# Altium PCB Pult S1 pcb.PcbDoc
Units mm, origin at the board's own origin, x right, y up, seen from the top; angles counter-clockwise.
Board outline 20.97 x 21.01 mm, 2 copper layers (Top Layer, Bottom Layer); 37 components, 31 nets, 108 pads, 30 vias.
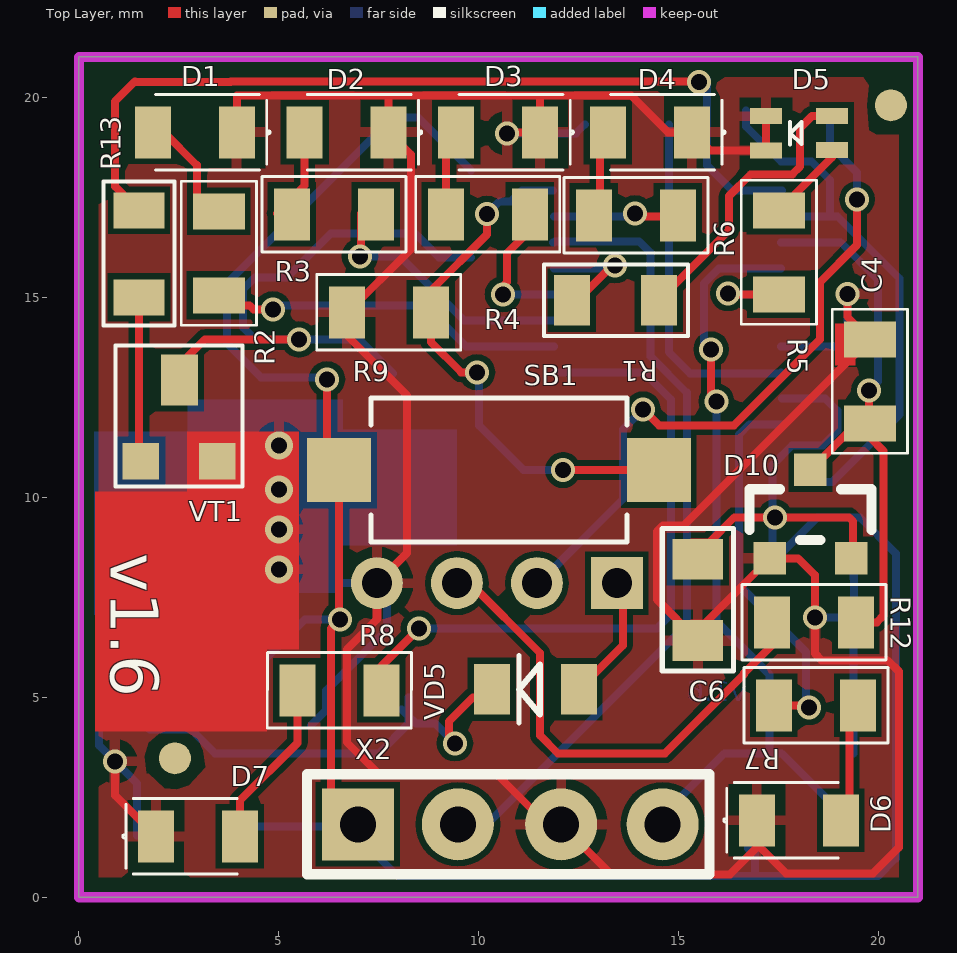
[diagram p0: Top Layer view]
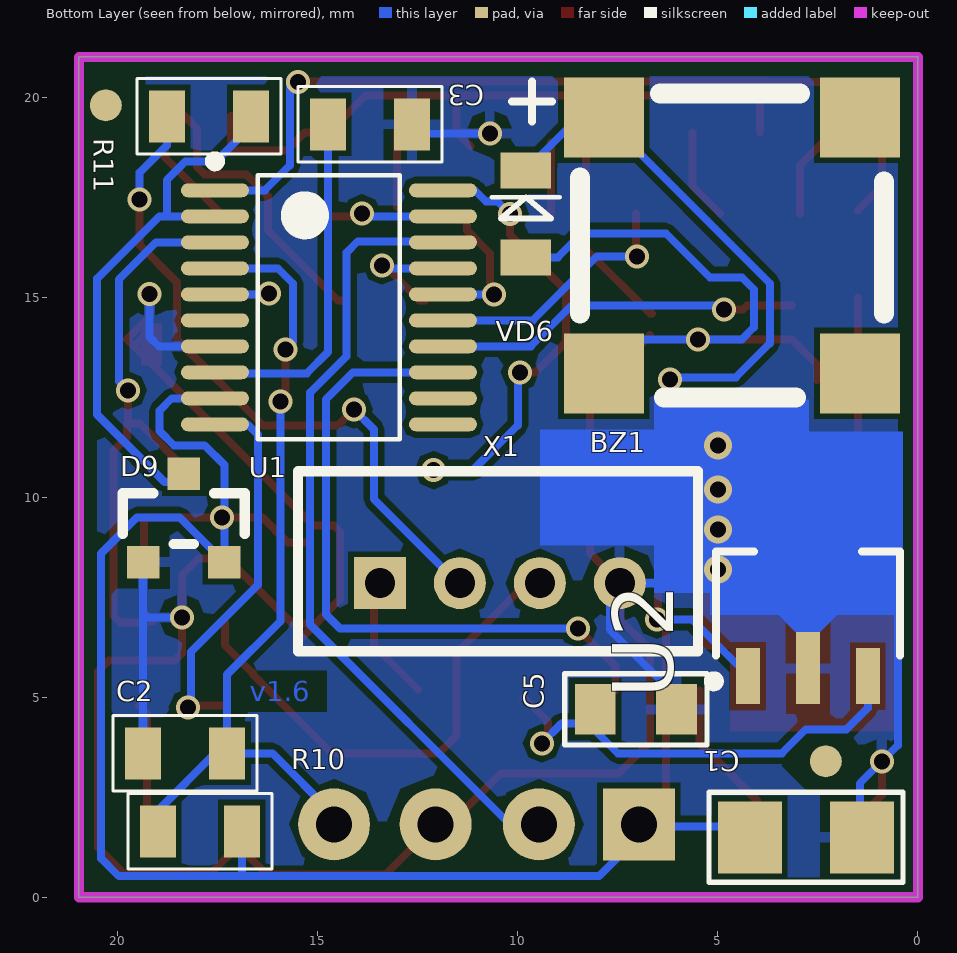
[diagram p1: Bottom Layer view, seen from below]
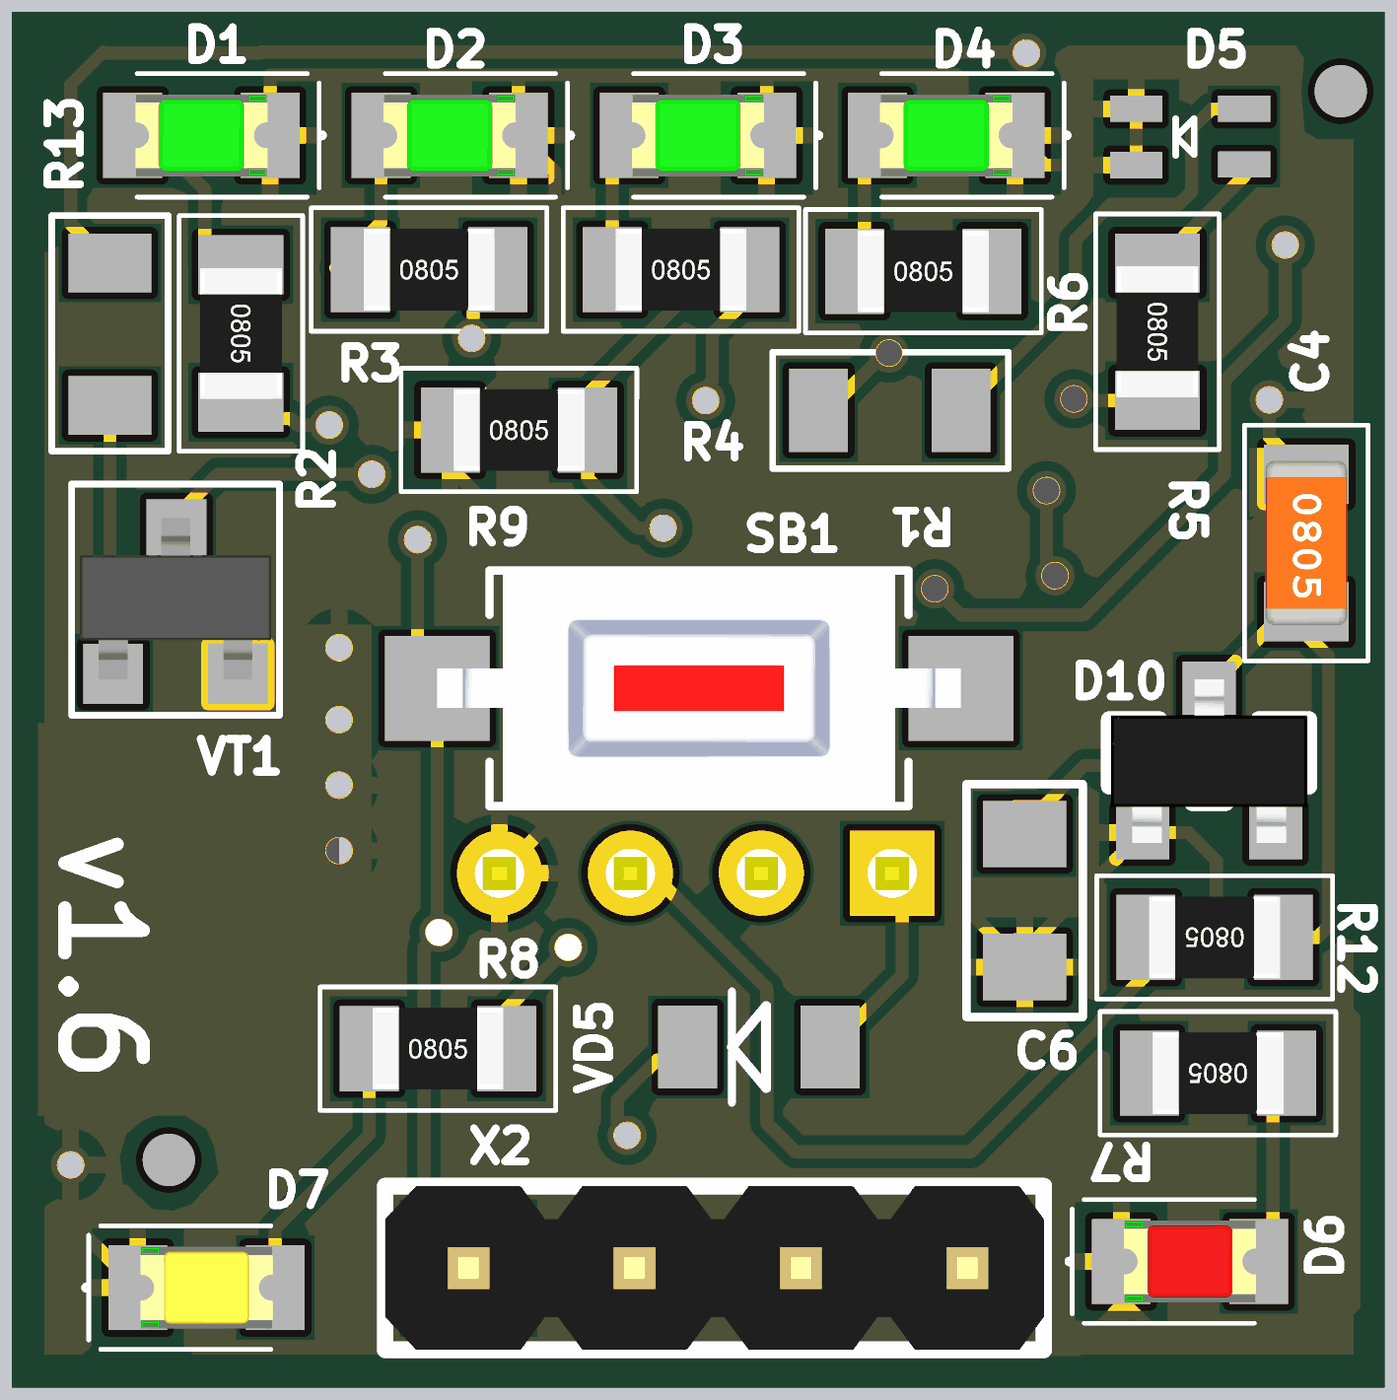
[diagram p2: 3D render of the assembled board from above, using the file's embedded part models]
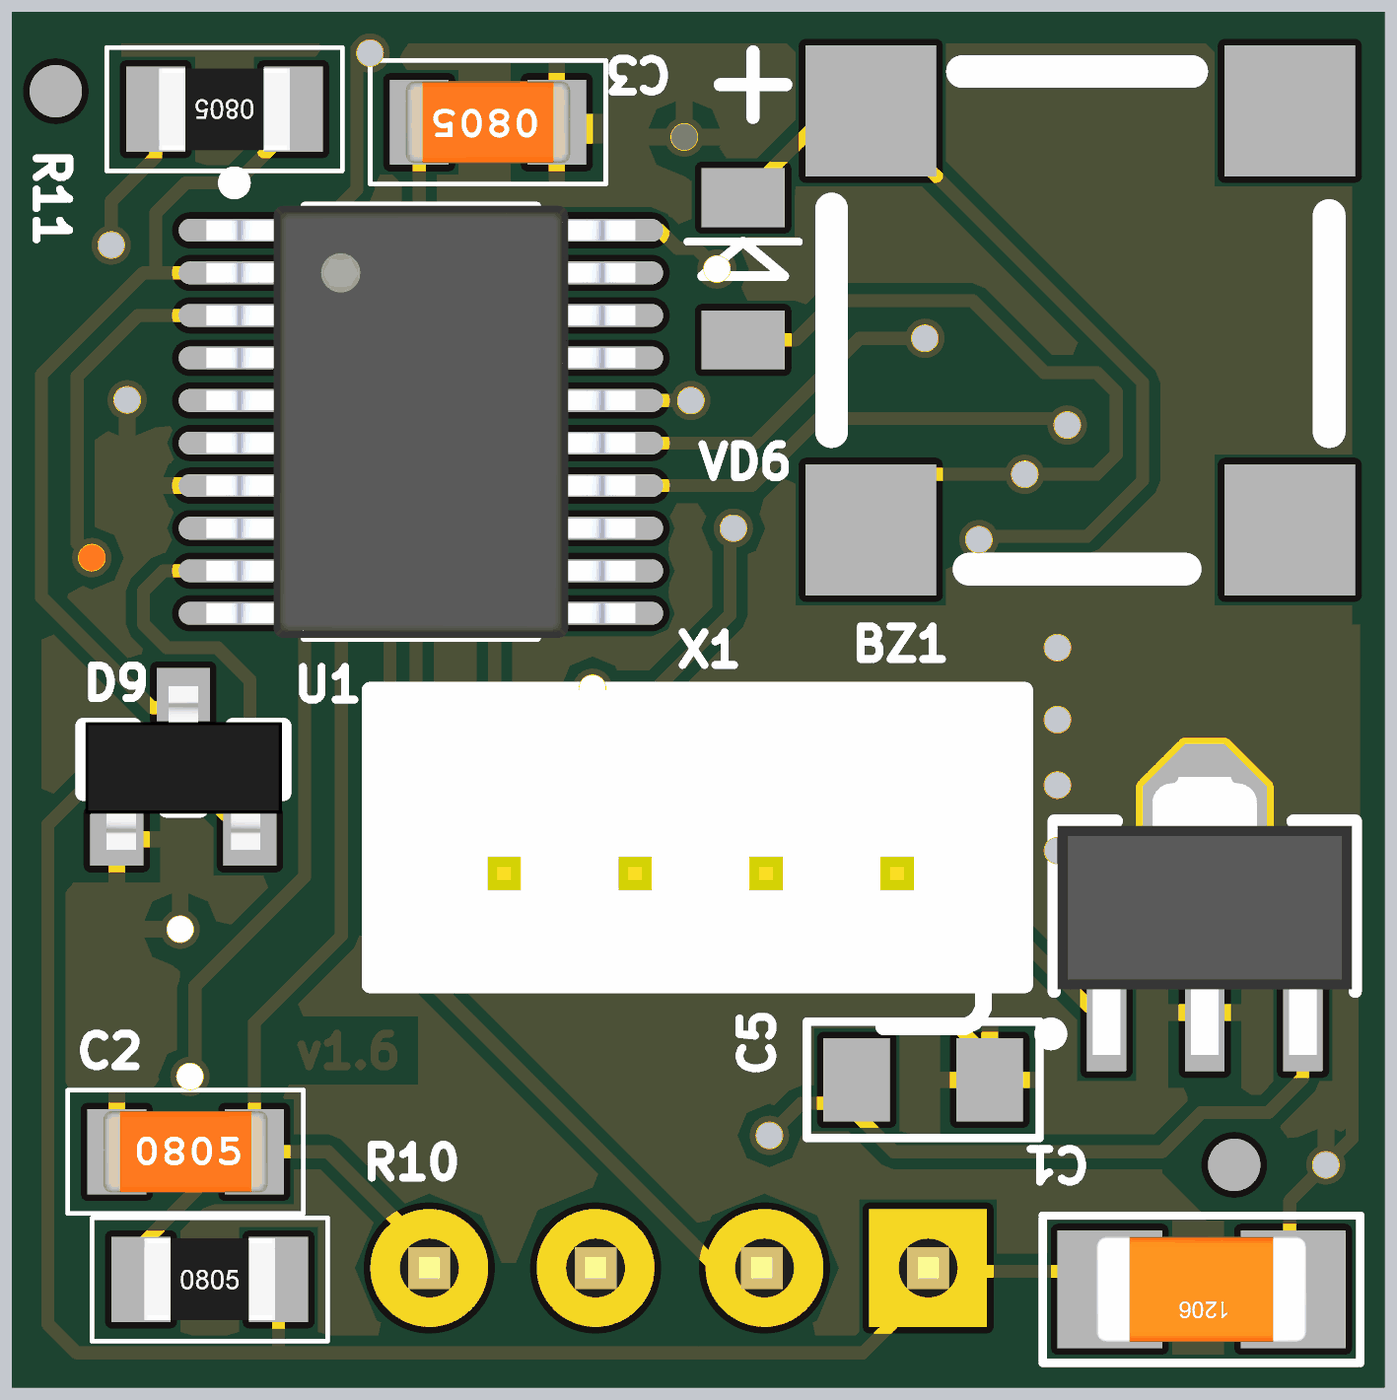
[diagram p3: 3D render of the assembled board from below, using the file's embedded part models]

## Layer stack, top to bottom
Top Solder: solder mask 0.0102, Solder Resist, Dk 3.5
Top Layer: signal copper 0.0356
Dielectric1: dielectric 0.32, FR-4, Dk 4.8
Bottom Layer: signal copper 0.0356
Bottom Solder: solder mask 0.0102, Solder Resist, Dk 3.5

## Board outline
0,0 20.973,0 20.973,21.009 0,21.009

## Design rules (kind name [scope] priority, off if disabled: settings)
Clearance [All] p1: gap=0.15
MinimumSolderMaskSliver [All] p1: minsoldermaskwidth=0.05
PolygonConnect [All] p1: connectstyle=Relief reliefconductorwidth=0.254 reliefentries=4 polygonreliefangle="90 Angle" airgapwidth=0.254
RoutingVias [All] p1: holewidth=0.4 width=0.6 viastyle="Through Hole" minholewidth=0.4 minwidth=0.6 maxholewidth=0.4 maxwidth=0.7
SMDNeckDown [All] p1: percent=100.000
SilkToSilkClearance [All] p1: silktosilkclearance=0.01
SilkToSolderMaskClearance [IsPad] p1: minsilkscreentomaskgap=0.1 clearancetoexposedcopper=TRUE
SolderMaskExpansion [All] p1: expansion=0.102
UnpouredPolygon [All] p1: allowunpoured=FALSE
Width [All] p1: maxlimit=0.4 minlimit=0.18 preferedwidth=0.18
26 further rules are at their usual default settings.

## Components (designator, comment, footprint, x,y, rotation, side; value= is the part's Value field where it differs from the comment)
BZ1 "HS7525M48" BUZER7.6x7.6 4.65,16.3 r180 bottom
C1 "25V 10uF" C_SMD_1206 2.8,1.5 r0 bottom
C2 "100n" C_SMD_0805_S 18.318,3.6 r180 bottom
C3 "470n" C_SMD_0805_S 13.698,19.325 r0 bottom
C4 "470p" C_SMD_0805_S 19.774,12.9 r270 top
C5 "100n" "0805 st" 7.05,4.7 r0 bottom
C6 "100n" "0805 st" 15.473,7.437 r90 top
D1 "GR" LED-0805_S_-GREEN 2.898,19.125 r0 top
D2 "GR" LED-0805_S_-GREEN 6.69,19.125 r0 top
D3 "GR" LED-0805_S_-GREEN 10.482,19.125 r0 top
D4 "GR" LED-0805_S_-GREEN 14.273,19.125 r0 top
D5 "KPTB-1612SURKCGKC" "LED 1.6x1.25 RG" 18,19.1 r0 top
D6 "RED" LED-0805_S_-RED 17.998,1.925 r180 top
D7 "YE" LED-0805_S_-YELLOW 2.975,1.525 r180 top
D9 "BAT54S" "SOT-23 - BAT54S" 19.368,8.374 r180 bottom
D10 "BAT54S" "SOT-23 - BAT54S" 17.273,8.475 r0 top
R1 "1k" "0805 W" 14.5,14.925 r180 top
R2 "1k" R_SMD_0805_S 3.5,16.1 r270 top
R3 "1k" R_SMD_0805_S 6.375,17.075 r0 top
R4 "1k" R_SMD_0805_S 10.223,17.075 r0 top
R5 "1k" R_SMD_0805_S 17.5,16.125 r270 top
R6 "1k" R_SMD_0805_S 13.925,17.05 r0 top
R7 "1k" R_SMD_0805_S 18.425,4.8 r180 top
R8 "1k" R_SMD_0805_S 6.511,5.175 r0 top
R9 "10k" R_SMD_0805_S 7.748,14.625 r0 top
R10 "10k" R_SMD_0805_S 17.948,1.65 r180 bottom
R11 "130R" R_SMD_0805_S 17.723,19.525 r0 bottom
R12 "510R" R_SMD_0805_S 18.375,6.875 r180 top
R13 "1K" "0805 W" 1.5,17.175 r270 top
SB1 "M1" MYGTUKAS_SMD_TACTILE_6x3.5 14.498,10.68 r180 top
U1 "STM8S003F3P6" TSSOP20_N 14.723,14.75 r180 bottom
U2 "78L05ACU" SOT89 2.75,7.328 r90 bottom
VD5 "CD4148" "0805 Diode" 12.5,5.2 r180 top
VD6 "CD4148" "0805 Diode" 9.8,16 r90 bottom
VT1 "BC817" SOT23-BCE 1.55,10.9 r90 top
X1 "B4B-PH-K-S" "JUNG_4k_1x4 kistukas" 13.45,7.855 r180 bottom
X2 "SWIM progr. jungtis" JUNG_4k_1x4_karpoma_kistukas 6.975,1.825 r0 top

## Footprints (in the part's own frame and the unit in brackets; to place one, negate y for a bottom-side part, rotate by r counter-clockwise, add the part's x,y. Pads: shape width x height; smd on the part's side, far side on the other; paste and mask are expansions set on the pad)
"0805 Diode" [mm]
  rect 0.9x1.27 smd: A(0,0) K(2.175,0)
  silkscreen extent 0.97,-0.85 1.5,0.85, body extent 0.09,-0.63 2.09,0.63, height 0.6
"0805 st" [mil]
  rect 40x50 smd: 1(-40,0) 2(40,0)
  silkscreen extent -70,-35 70,35, body extent -39,-25 39,25, height 20
"0805 W" [mm]
  rect 0.9x1.27 smd: 1(0,0) 2(2.175,0)
  silkscreen extent -0.72,-0.89 2.88,0.89, body extent 0.09,-0.62 2.09,0.62, height 0.9
BUZER7.6x7.6 [mm]
  rect 2x2 smd: +(-3.2,3.2) -(-3.2,-3.2) nc(3.2,-3.2) nc(3.2,3.2)
  silkscreen extent -5.5,-3.8 3.8,4.1, body extent -3.8,-3.8 3.8,3.8, height 2.5
C_SMD_0805_S [mm]
  rect 0.9x1.3 smd: 1(-1.05,0) 2(1.05,0)
  silkscreen extent -1.8,-0.94 1.8,0.94, body extent -1.25,-0.62 1.25,0.62, height 0.79
C_SMD_1206 [mm] "3.2 × 1.6 mm"
  rect 1.6x1.8 smd: 1(-1.4,0) 2(1.4,0)
  silkscreen extent -2.42,-1.12 2.42,1.12, body extent -1.6,-0.8 1.6,0.8, height 1
"JUNG_4k_1x4 kistukas" [mm] "JST Jungtis 2mm_kistukas"
  rect 1.3x1.3 hole 0.75: 1(0,0)
  round 1.3 hole 0.75: 2(2,0) 3(4,0) 4(6,0)
  silkscreen extent -2.05,-1.7 7.95,2.8, body extent -2.05,-1.7 7.95,2.8, height 6
JUNG_4k_1x4_karpoma_kistukas [mm] "Karpoma jungtis 2.54 mm_kistukas"
  rect 1.8x1.8 hole 0.9: 1(0,0)
  round 1.8 hole 0.9: 2(2.5,0) 3(5.08,0) 4(7.62,0)
  silkscreen extent -1.27,-1.25 8.79,1.25, body extent -1.27,-1.25 8.79,1.25, height 8.62
"LED 1.6x1.25 RG" [mm]
  rect 0.8x0.4 smd: 1(0.825,0.43) 2(-0.825,0.43) 3(0.825,-0.42) 4(-0.825,-0.43)
  silkscreen extent -0.22,-0.28 0.06,0.28, body extent -0.8,-0.62 0.8,0.62, height 0.7
LED-0805_S_-GREEN [mm]
  rect 0.9x1.3 smd: A(-1.05,0) K(1.05,0)
  silkscreen extent -0.98,-0.94 1.88,0.94, body extent -1.01,-0.62 1.01,0.63, height 1.1
LED-0805_S_-RED [mm]
  rect 0.9x1.3 smd: A(-1.05,0) K(1.05,0)
  silkscreen extent -0.98,-0.94 1.88,0.94, body extent -1.01,-0.62 1.01,0.63, height 1.1
LED-0805_S_-YELLOW [mm]
  rect 0.9x1.3 smd: A(-1.05,0) K(1.05,0)
  silkscreen extent -0.98,-0.94 1.88,0.94, body extent -1.01,-0.62 1.01,0.63, height 1.1
MYGTUKAS_SMD_TACTILE_6x3.5 [mm] "6 mm x 3.5 mm;"
  rect 1.6x1.6 smd: 1(0,0) 2(8,0)
  silkscreen extent 0.8,-1.8 7.2,1.8, body extent 0,-1.8 8,1.8, height 2.5
R_SMD_0805_S [mm]
  rect 0.9x1.3 smd: 1(-1.05,0) 2(1.05,0)
  silkscreen extent -1.8,-0.94 1.8,0.94, body extent -1,-0.62 1,0.63, height 0.6
SOT23-BCE [mil]
  rect 36x36 smd: B(0,0) E(0,-75)
  rect 50x36 smd: C(80,-38)
  silkscreen extent -25,-100 114,25, body extent -3,-95 94,20, height 41
SOT89 [mm] "SOT89, 3-Leads, Body 4,50x2,45mm, Pitch 1,50mm, Lead Span 4,1mm, IPC Medium Density"
  rect 1.4x0.6 smd: 1(-1.8,1.5) 3(-1.8,-1.5)
  rect 1.8x0.6 smd: 2(-1.6,0)
  Top Layer region: -0.7,0.3 -0.05,0.95 1.85,0.95 2.5,0.3 2.5,-0.3 1.85,-0.95 -0.05,-0.95 -0.7,-0.3
  silkscreen extent -2.05,-2.3 1.32,2.48, body extent -2.25,-2.25 2,2.25, height 1.54
"SOT-23 - BAT54S" [mil]
  rect 32x32 smd: 1(0,0) 2(80,0) 3(40,87)
  silkscreen extent -20,18 100,68, body extent -19,-6 99,92, height 41
TSSOP20_N [mm] "TSOP, 20-Leads, Body 6.5x4.4mm, Pitch 0.65mm, IPC Medium Density"
  oval 1.7x0.35 smd: 1(-2.85,2.925) 2(-2.85,2.275) 3(-2.85,1.625) 4(-2.85,0.975) 5(-2.85,0.325) 6(-2.85,-0.325) 7(-2.85,-0.975) 8(-2.85,-1.625) 9(-2.85,-2.275) 10(-2.85,-2.925) 11(2.85,-2.925) 12(2.85,-2.275) 13(2.85,-1.625) 14(2.85,-0.975) 15(2.85,-0.325) 16(2.85,0.325) 17(2.85,0.975) 18(2.85,1.625) 19(2.85,2.275) 20(2.85,2.925)
  silkscreen extent -2.98,-3.3 1.77,3.77, body extent -3.27,-3.3 3.28,3.3, height 1.2

## Part data
BZ1: library part "Buzzer AD-8505-FQ4-LF", "Buzzer, Magnetic SMD"
C1 C2 C3 C4 C5 C6: library part "Kondensatorius SMD"
D1 D2 D3 D4 D6 D7: library part "Sviesos diodas SMD 0805", "LED SMD 0805"
D5: library part LEDx2, "LED DIODE"
D9 D10: library part "Diodas BAT54S", "Dvygubas Sotki diodas"
R1 R2 R3 R4 R5 R6 R7 R8 R9 R10 R11 R12 R13: library part "Resistorius SMD", "Resistorius SMD"
SB1: library part "Mygtukas SMD", "Tactile Switch SMD"
U1: library part "Mikrovaldiklis STM8S003F3P6", "STM8, 16MHZ, TSSOP-20"
U2: library part "Itampos stabilizatorius 78L05ACD", "SMD +5V 100mA"
VD5 VD6: library part "DIODE SMD", "DIODE"
VT1: library part NPN-GENERIC, "NPN BIPOLAR TRANSISTOR"
X1: library part "Jungtis 4k JST B4B-PH-K-S", "4k; 2mm; B4B-PH-K-S"
X2: library part "Jungtis 4k karpoma 1x statmena Tevelis", "Tevelis 1-12 kontaktu"

## Free pads (board coordinates)
  round 0.8 smd far side: NC(2.3,3.4) NC(20.3,19.8)
  round 0.8 smd: NC(2.4,3.475) NC(20.3,19.8)

## Via types
v1: diameter 0.6, hole 0.4, Top Layer to Bottom Layer, tented both sides, 26 vias
v2: diameter 0.7, hole 0.4, Top Layer to Bottom Layer, tented both sides, 4 vias

## Nets (pads, with @x,y where several pads share a name; then routed paths per layer and width w, separated by ;. In a path a pad name is that pad's centre, name@x,y a point inside that pad or via, vN(x,y) a via of type N, cw(c..) or ccw(c..) an arc to the next point about the centre after c; other vN are vias at no path point)
5V: BZ1.+ C1.2 C6.2 D9.2 D10.2 R10.2 SB1.2 U1.9 U2.1 VD6.K X2.1 | length 69.7
  Top Layer w0.2: SB1.2@5.8,9.981 6.5,9.981 6.5,6.975 v1(6.525,6.95) 6.298,6.723 6.298,2.502 6.375,2.425 7.4,2.425 6.975,2 X2.1 ; v1(6.2,12.95) 6.2,10.978 SB1.2 ; C6.2@15.323,8.871 15.756,8.871 16.385,9.5 19.1,9.5 19.249,9.5 19.349,9.4 D10.2@19.349,8.519 ; D10.2 D10.2@19.349,8.519 ; D10.2@19.448,8.618 D10.2@19.349,8.519
  Bottom Layer w0.2: C1.2@4.225,1.775 6.925,1.775 X2.1 ; U2.1@4.514,5.814 5.65,6.95 v1(6.525,6.95) ; v1(6.2,12.95) 6.175,12.975 6.175,13 4.55,13 3.7,13.85 3.7,15.35 BZ1.+ 8.475,19.5 VD6.K ; X2.1@6.824,1.674 7.971,0.527 16.9,0.527 ; R10.2@16.723,1.223 R10.2@16.723,1.524 ; R10.2 16.898,0.529 16.9,0.527 ; U1.9 18.65,12.475 18.96,12.165 18.96,11.66 18.6,11.3 17.831,11.3 17.336,10.805 D9.2 18.462,9.5 19.1,9.5 19.521,9.5 20.423,8.598 20.423,0.975 19.975,0.527 16.9,0.527
  other v1: 17.4,9.5
12V: VD5.A X1.1 | length 3.2
  Top Layer w0.2: VD5.A 13.6,6.3 13.6,7.6 13.45,7.75 X1.1
GND: C1.1 C2.1 C3.1 C4.1 C5.1 C6.1 D1.K D2.K D3.K D4.K D5.2 D5.4 D6.K D7.K D9.1 D10.1 R9.1 U1.7 U2.2 VT1.E X1.4 X2.3 | length 107.9
  Top Layer w0.2: v1(0.9,3.4) 0.9,2.55 D7.K ; D1.K 3.948,20.05 7.74,20.05 ; R9.1@6.648,14.6 R9.1@6.698,14.6 ; R9.1@6.698,14.052 8.2,12.55 8.2,8.605 X1.4 7.45,6.95 6.698,6.198 6.698,3.877 7.475,3.1 10.423,3.1 X2.3@11.673,1.85 ; R9.1 R9.1@6.698,14.6 ; v1(10.7,19.1) 10.725,19.125 D3.K ; D3.K@11.178,18.771 D3.K ; 11.532,20 D3.K ; X2.3@11.612,1.85 X2.3@11.673,1.85 ; X2.3@12.03,1.85 X2.3@11.673,1.85 ; X2.3 13.305,0.575 16.275,0.575 16.948,1.248 D6.K@16.948,1.33 ; C6.1@15.323,6.839 15.637,6.839 D10.1 17.976,8.475 18.4,8.051 v1(18.4,7) 18.4,6.096 18.571,5.925 20.218,5.925 20.5,5.643 20.5,1.25 19.85,0.6 17.678,0.6 D6.K@16.948,1.33 ; C6.1 14.45,7.443 14.45,9.15 14.6,9.3 15.124,9.3 C4.1 19.21,14.514 v1(19.21,15.085) ; D6.K D6.K@16.948,1.33 ; D5.2 D5.4 15.778,18.67 D4.K 14.725,19.125 13.8,20.05 7.74,20.05 ; C4.1@19.369,14.004 C4.1@19.548,13.825 ; R9.1@6.698,14.6 8.3,16.202 8.3,18.565 D2.K 7.74,20.05
  Bottom Layer w0.2: 1.32,8.72 0.5,7.9 0.5,3.8 1.45,2.85 C1.1@1.45,1.55 ; 2.75,8.72 3.615,7.855 X1.4 ; C5.1@5.8,4.3 6.175,4.675 6.175,5.164 7.7,6.689 X1.4@7.7,7.605 ; X1.4@7.45,7.805 X1.4 ; X1.4@7.85,8.255 X1.4 ; v1(10.7,19.1) 12.423,19.1 C3.1 ; U1.7@17.548,13.775 U1.7 18.975,13.775 19.21,14.01 v1(19.21,15.085) ; v1(18.4,7) 19.273,7 19.373,7.1 ; C2.1 19.368,6.43 19.373,6.425 19.373,7.1 ; D9.1@19.368,7.968 D9.1 ; D9.1@19.398,8.175 19.373,8.175 19.373,7.1
  other v2: 5,8.2 5,9.2 5,10.2 5,11.3
NetBZ1_2: BZ1.- VD6.A VT1.C | length 15.3
  Top Layer w0.2: VT1.C 2.515,13.315 3.148,13.948 v1(5.5,13.948)
  Bottom Layer w0.2: BZ1.- 7.002,13.948 v1(5.5,13.948) 4.402,13.948 4.1,14.25 4.1,15.2 4.4,15.5 5.2,15.5 6.3,16.6 8.4,16.6 9,16 VD6.A
NetC2_2: C2.2 R10.1 U1.4 X2.4 | length 21.2
  Top Layer w0.2: X2.4@14.268,1.85 X2.4@14.573,1.85 ; v1(15.806,13.7) 15.806,12.531 v1(15.937,12.4)
  Bottom Layer w0.2: X2.4 14.595,2.058 16.137,3.6 C2.2 ; v1(15.806,13.7) 15.625,13.881 15.625,15.349 16.002,15.725 U1.4@17.548,15.725 ; v1(15.937,12.4) 15.937,6.899 17.268,5.568 C2.2 ; R10.1 18.998,2.17 17.568,3.6 C2.2
NetC3_2: C3.2 U1.8 | length 8.7
  Bottom Layer w0.2: C3.2 14.748,13.629 15.277,13.1 17.523,13.1 U1.8@17.548,13.125
NetC4_2: C4.2 D10.3 R12.1 U1.3 | length 14.6
  Top Layer w0.2: D10.3 19.454,11.85 C4.2 19.774,11.499 20.113,11.16 20.113,7.042 19.946,6.875 R12.1@19.246,6.875 ; R12.1@19.123,6.9 19.262,7.038 R12.1@19.33,7.107 ; C4.2@19.75,11.927 v1(19.75,12.675)
  Bottom Layer w0.2: U1.3@17.548,16.375 U1.3 19.044,16.375 19.975,15.444 19.975,12.9 v1(19.75,12.675)
NetC5_2: C5.2 U2.3 VD5.K | length 12.3
  Top Layer w0.2: v1@9.252,4.052 9.252,4.398 9.853,5
  Bottom Layer w0.2: U2.3@1.25,5.55 1.25,4.73 1.78,4.2 2.8,4.2 3.4,3.6 7.5,3.6 8.241,4.341 C5.2@8.241,4.525 ; C5.2 C5.2@8.241,4.525 ; C5.2@8.241,4.7 C5.2@8.241,4.875 ; C5.2@8.241,5 C5.2@8.241,4.875 ; v1(9.4,3.85) 8.909,4.341 8.425,4.341 C5.2@8.241,4.525 ; C5.2@8.241,4.525 C5.2@8.241,4.875
NetD1_A: D1.A R2.1 | length 2.6
  Top Layer w0.2: D1.A 2.125,19.125 2.948,18.302 R2.1@2.948,17.1
NetD2_A: D2.A R3.1 | length 2.3
  Top Layer w0.2: R3.1@4.95,17.1 5.64,17.79 D2.A
NetD3_A: D3.A R4.1 | length 1.8
  Top Layer w0.2: R4.1 D3.A@9.173,18.867
NetD4_A: D4.A R6.1 | length 1.9
  Top Layer w0.2: R6.1@13.023,17.257 D4.A@13.023,19.157
NetD5_1: D5.1 R1.1 | length 7.5
  Top Layer w0.2: R1.1@14.325,14.925 R1.1 16.25,16.675 16.25,17.531 16.794,18.075 17.834,18.075 18.025,18.266 18.025,19.225 18.33,19.53 D5.1
NetD5_3: D5.3 R5.1 | length 2.1
  Top Layer w0.2: R5.1 18.825,18.5 D5.3
NetD6_A: D6.A R7.1 | length 3.2
  Top Layer w0.2: D6.A@19.246,1.925 D6.A 19.268,2.145 19.268,4.593 R7.1
NetD7_A: D7.A R8.1 | length 3.9
  Top Layer w0.2: D7.A@4.023,1.9 4.023,2.423 5.461,3.861 R8.1
NetD9_3: D9.3 R11.1 U1.2 | length 13.7
  Bottom Layer w0.2: R11.1@16.673,19.675 R11.1 16.673,19.275 17.548,18.4 18.31,18.4 18.773,17.936 18.773,17.025 ; U1.2@17.548,17.025 U1.2 18.773,17.025 ; D9.3@18.532,10.385 18.835,10.385 20.519,12.069 20.519,15.466 18.96,17.025 18.773,17.025
NetR1_2: R1.2 U1.17 | length 3.5
  Top Layer w0.2: R1.2 12.463,14.925 v1@13.338,15.8 ; v1@13.2,15.8 v1@13.338,15.8 ; v1@13.281,15.856 v1@13.394,15.856 ; v1@13.338,15.8 v1(13.4,15.8) 13.4,15.85 v1@13.394,15.856 ; v1@13.338,15.8 v1@13.394,15.856
  Bottom Layer w0.2: U1.17 13.15,15.725 13.281,15.856 13.394,15.856 13.4,15.85 v1(13.4,15.8) ; v1(13.4,15.8) 13.417,15.816 v1(13.4,15.8)
NetR2_2: R2.2 U1.14 | length 9.2
  Top Layer w0.2: R2.2@3.148,14.8 4.265,14.8 4.365,14.7 v1(4.85,14.7)
  Bottom Layer w0.2: v1@4.81,14.74 v1(4.85,14.7) ; v1@4.85,14.8 8.65,14.8 9.675,13.775 U1.14
NetR3_2: R3.2 U1.15 | length 6.6
  Top Layer w0.2: v1(7.025,16.025) 7.05,16.05 R3.2@7.05,17.1
  Bottom Layer w0.2: v1(7.025,16.025) 8.025,16.025 9.625,14.425 U1.15
NetR4_2: R4.2 U1.16 | length 4
  Top Layer w0.2: v1(10.6,15.075) 10.398,15.075 10.7,15.377 10.7,16.1 11.273,16.673 R4.2
  Bottom Layer w0.2: v1@10.5,15.175 v1(10.6,15.075) U1.16
NetR5_2: R5.2 U1.5 | length 2.6
  Top Layer w0.2: v1@16.25,15.075 R5.2
  Bottom Layer w0.2: v1(16.225,15.1) 16.275,15.1 16.275,15.075 U1.5
NetR6_2: R6.2 U1.19 | length 3.5
  Top Layer w0.2: v1(13.9,17.1) 13.9,17.013 13.913,17 13.852,17 13.826,17.026 R6.2@14.951,17.026
  Bottom Layer w0.2: U1.19 v1@13.825,17.025 ; v1@13.826,17.026 13.852,17 13.913,17 13.9,17.013 v1(13.9,17.1)
NetR7_2: R7.2 U1.10 | length 9.6
  Top Layer w0.2: R7.2 18.201,4.8 v1(18.251,4.75)
  Bottom Layer w0.2: U1.10 16.759,11.825 16.5,11.566 16.5,7.804 18.175,6.129 v1@18.175,4.8 ; v1@18.225,4.75 v1(18.251,4.75)
NetR8_2: R8.2 U1.13 | length 17
  Top Layer w0.2: R8.2 7.561,5.784 v1(8.5,6.723)
  Bottom Layer w0.2: v1(8.5,6.723) 14.448,6.723 14.797,7.072 14.797,12.449 14.121,13.125 U1.13
NetR9_2: R9.2 SB1.1 U1.20 | length 13.5
  Top Layer w0.2: v1(9.95,13.126) 9.557,13.126 8.798,13.884 R9.2 8.798,15.166 10.2,16.568 v1(10.2,17.084) ; v1(12.102,10.68) SB1.1
  Bottom Layer w0.2: v1@9.846,13.1 10,12.946 10,11.8 11.12,10.68 v1(12.102,10.68) ; v1(10.2,17.084) 10.516,17.4 10.8,17.4 11.075,17.675 U1.20@11.848,17.675
NetR11_2: R11.2 X1.2 | length 17.4
  Top Layer w0.2: v1@14.196,12.2 v1(14.1,12.2) 14.5,11.8 16.375,11.8 18.523,13.948 18.523,15.373 19.453,16.303 v1(19.453,17.45)
  Bottom Layer w0.2: X1.2@11.45,7.805 13.598,9.953 13.598,11.698 v1(14.1,12.2) v1@14.196,12.2 ; R11.2 18.773,18.8 19.453,18.12 v1(19.453,17.45)
NetR12_2: R12.2 X1.3 | length 12.8
  Top Layer w0.2: X1.3@9.45,7.523 X1.3@9.45,7.805 ; X1.3 9.779,7.855 11.532,6.102 11.532,4.041 11.973,3.6 14.651,3.6 16.625,5.574 16.625,5.601 17.325,6.301 R12.2
NetR13_1: R13.1 U1.1 | length 22.3
  Top Layer w0.2: R13.1 0.9,17.775 0.9,19.9 1.4,20.4 1.418,20.382 3.785,20.382 3.803,20.4 15.482,20.4 v1(15.5,20.382)
  Bottom Layer w0.2: v1(15.5,20.382) 15.568,20.45 15.7,20.45 15.7,18.3 16.325,17.675 U1.1
NetR13_2: R13.2 VT1.B | length 4.1
  Top Layer w0.2: R13.2 1.5,10.95 VT1.B
NetU1_18: U1.18 X2.2 | length 20.3
  Bottom Layer w0.2: X2.2@9.148,1.85 10.225,1.85 15.197,6.822 15.197,12.614 14.287,13.525 14.287,16.114 14,16.4 11.898,16.4 U1.18 U1.18@11.848,16.375
pads on no net: BZ1.nc U1.6 U1.11 U1.12

## Polygon pours and split planes (outlines as drawn)
GND on Bottom Layer "GNDtop" (solid, pour order 4): 0.5,20.532 20.475,20.532 20.518,20.514 20.518,0.5 0.527,0.5 0.5,0.527
GND on Top Layer "GNDtop" (solid, pour order 6): 0.5,20.5 0.5,0.5 20.5,0.5 20.5,20.5

## Keep-outs
Keep-Out Layer:
  the board outline again, w0.254

## Other copper
Top Layer:
  rectangle net GND: 18.9,13.3 19.42,14.35
  rectangle net GND: 2.7,6.2 5.5,11.65
  rectangle net GND: 0.4,4.15 4.7,10.15
  pour cut-out: 19.946,20.55 19.744,20.353 19.697,19.8 19.749,19.18 19.946,19.068 20.9,19.068 20.9,20.5
  pour cut-out: 1.998,4.074 1.75,3.867 1.648,3.527 1.698,3.1 1.75,3.1 2.15,2.725 2.45,2.7 2.75,2.8 3.159,3.257 3.098,3.663 3.048,3.782 2.968,3.95 2.611,4.177 2.3,4.2
Bottom Layer:
  rectangle net GND: 2.719,7.605 6.6,12.449
  rectangle net GND: 0.375,7.06 5.2,11.65
  rectangle net GND: 6,8.8 9.45,11.7
  pour cut-out: 2,2.55 2.725,2.55 2.8,2.625 2.8,2.675 3.4,3.275 3.4,3.6 2.8,4.2 1.78,4.2 1.334,3.527 1.45,2.85
  pour cut-out: 19.3,20.8 19.3,18.623 19.623,18.3 20.85,18.3 20.85,20.75 20.8,20.8
  text "v1.6" at 16.7,4.9 h0.5

## Silkscreen, mask and mechanical layers (free items; w line width, h text height)
Top Overlay:
  text "v1.6" at 0.8,8.6 h1.2 r270
Mechanical 2:
  lines w0.1: 8.4,10.6 8.4,10.1 6,10.1 6,6.5 15,6.5 15,10.1 12.6,10.1 12.6,10.6 ; 0,0 0,21 21,21 21,0 0,0 ; 5.5,6 5.5,10.6 15.5,10.6 15.5,6 5.5,6 ; 17.625,18.375 17.625,19.875 18.371,19.875 18.373,19.873 18.373,18.375 17.625,18.375
Mechanical 3:
  lines w0.1: 1.8,1.3 4.05,1.3 4.05,2.5 1.8,2.5 ; 9.175,10 ccw(c9.275,10) 9.275,9.9 ; 9.175,10 9.175,11 ; 9.175,10 11.825,10 ; 9.175,11 cw(c9.275,11) 9.275,11.1 ; 9.175,11 11.825,11 ; 9.275,9.9 11.725,9.9 ; 9.275,9.9 9.275,11.1 ; 9.275,11.1 11.725,11.1 ; 11.725,9.9 ccw(c11.725,10) 11.825,10 ; 11.725,9.9 11.725,11.1 ; 11.725,11.1 cw(c11.725,11) 11.825,11 ; 11.825,10 11.825,11 ; 0,0 0,21 21,21 21,0 0,0 ; 1.8,18.5 1.8,19.7 4,19.7 4,18.5 1.8,18.5 ; 5.6,18.5 7.8,18.5 7.8,19.7 5.6,19.7 5.6,18.5 ; 7.47,8.63 13.53,8.63 13.53,12.37 7.47,12.37 7.47,8.63 ; 8.27,9.43 12.73,9.43 12.73,11.57 8.27,11.57 8.27,9.43 ; 9.4,18.5 9.4,19.8 11.6,19.8 11.6,18.5 9.4,18.5 ; 13.2,18.5 15.4,18.5 15.4,19.7 13.2,19.7 13.2,18.5 ; 16.95,1.3 16.95,2.5 19.2,2.5 19.2,1.3 16.95,1.3 ; 17,18.5 19.2,18.5 19.2,19.7 17,19.7 17,18.5

## Dimensions
0,21.009 to 20.998,21.05 on Mechanical 13
0,21 to 0,0 on Mechanical 13